# Altium PCB SB_Valve_3_v1.1.PcbDoc
Units mm, origin at the board's own origin, x right, y up, seen from the top; angles counter-clockwise.
Board outline 53.4 x 39.3 mm, 2 copper layers (Top Layer, Bottom Layer), stack 1.569 mm thick; 15 components, 16 nets, 58 pads, 7 vias.
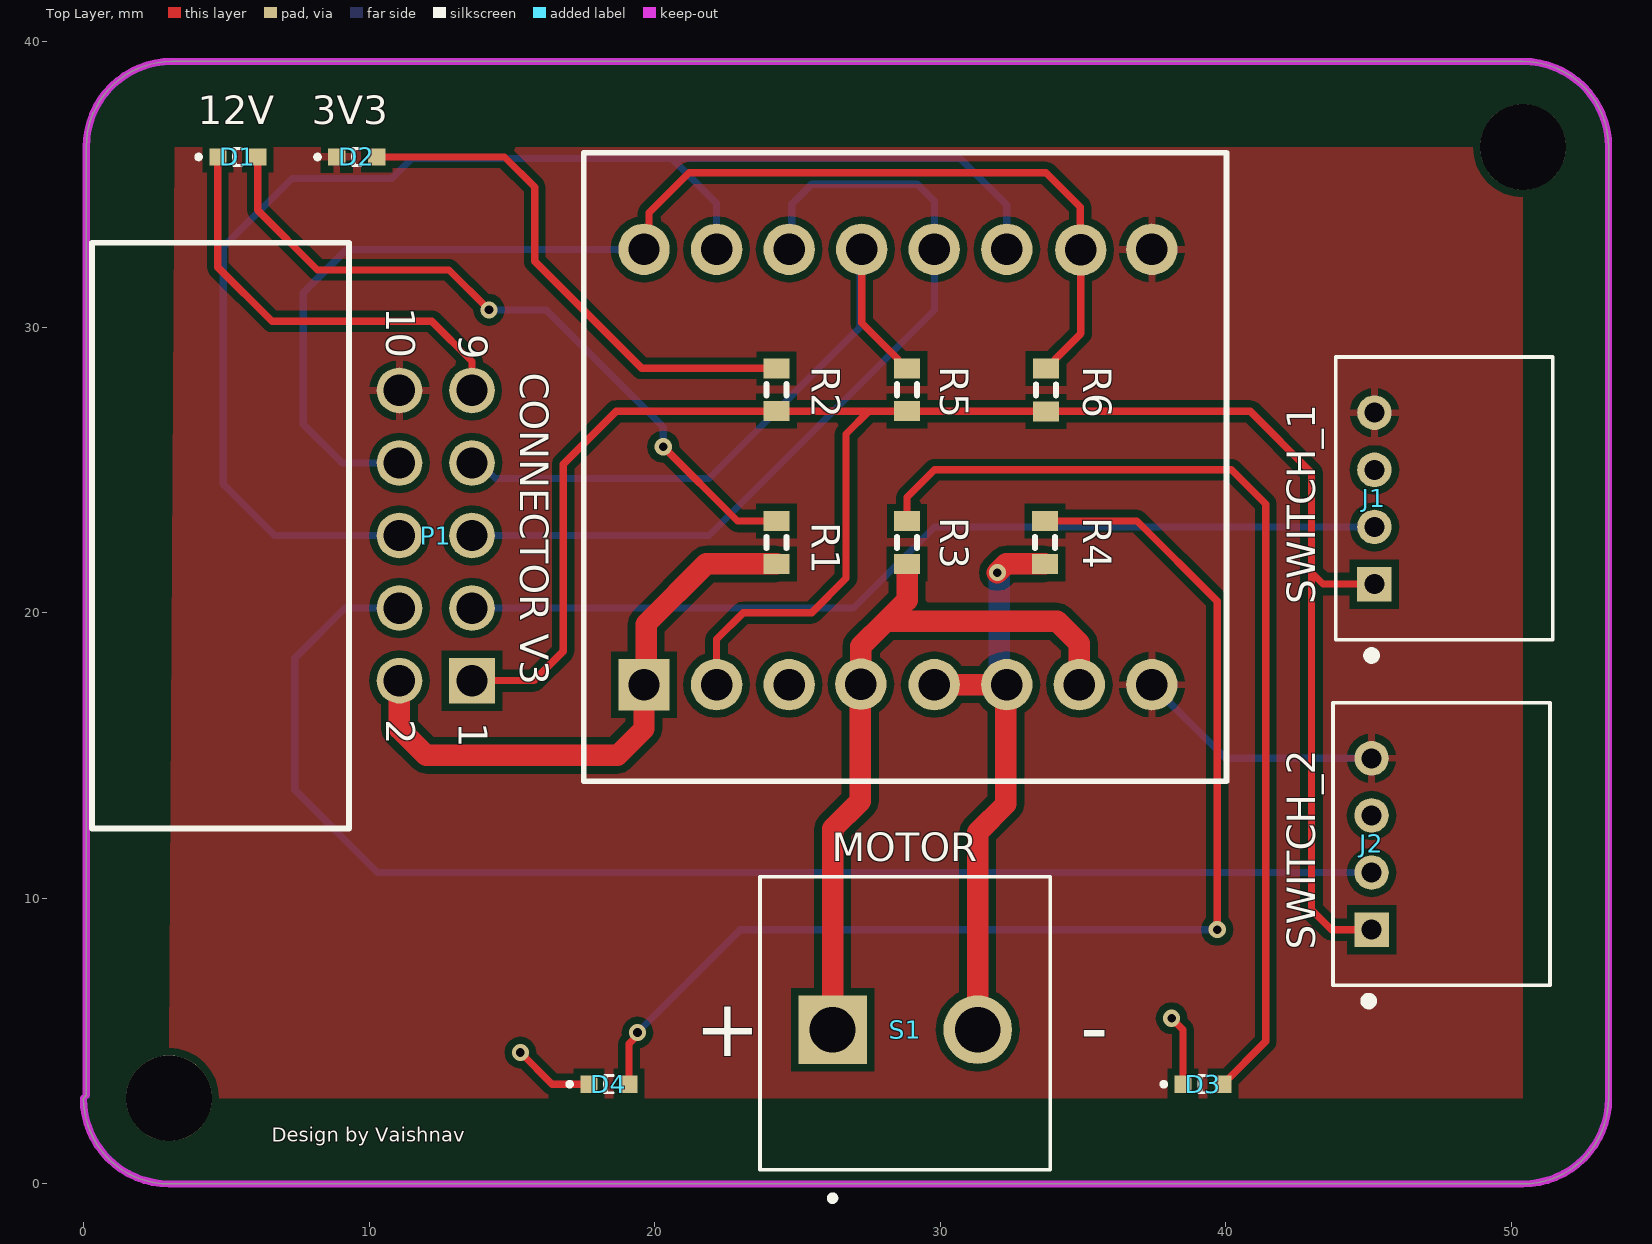
[diagram p0: Top Layer view]
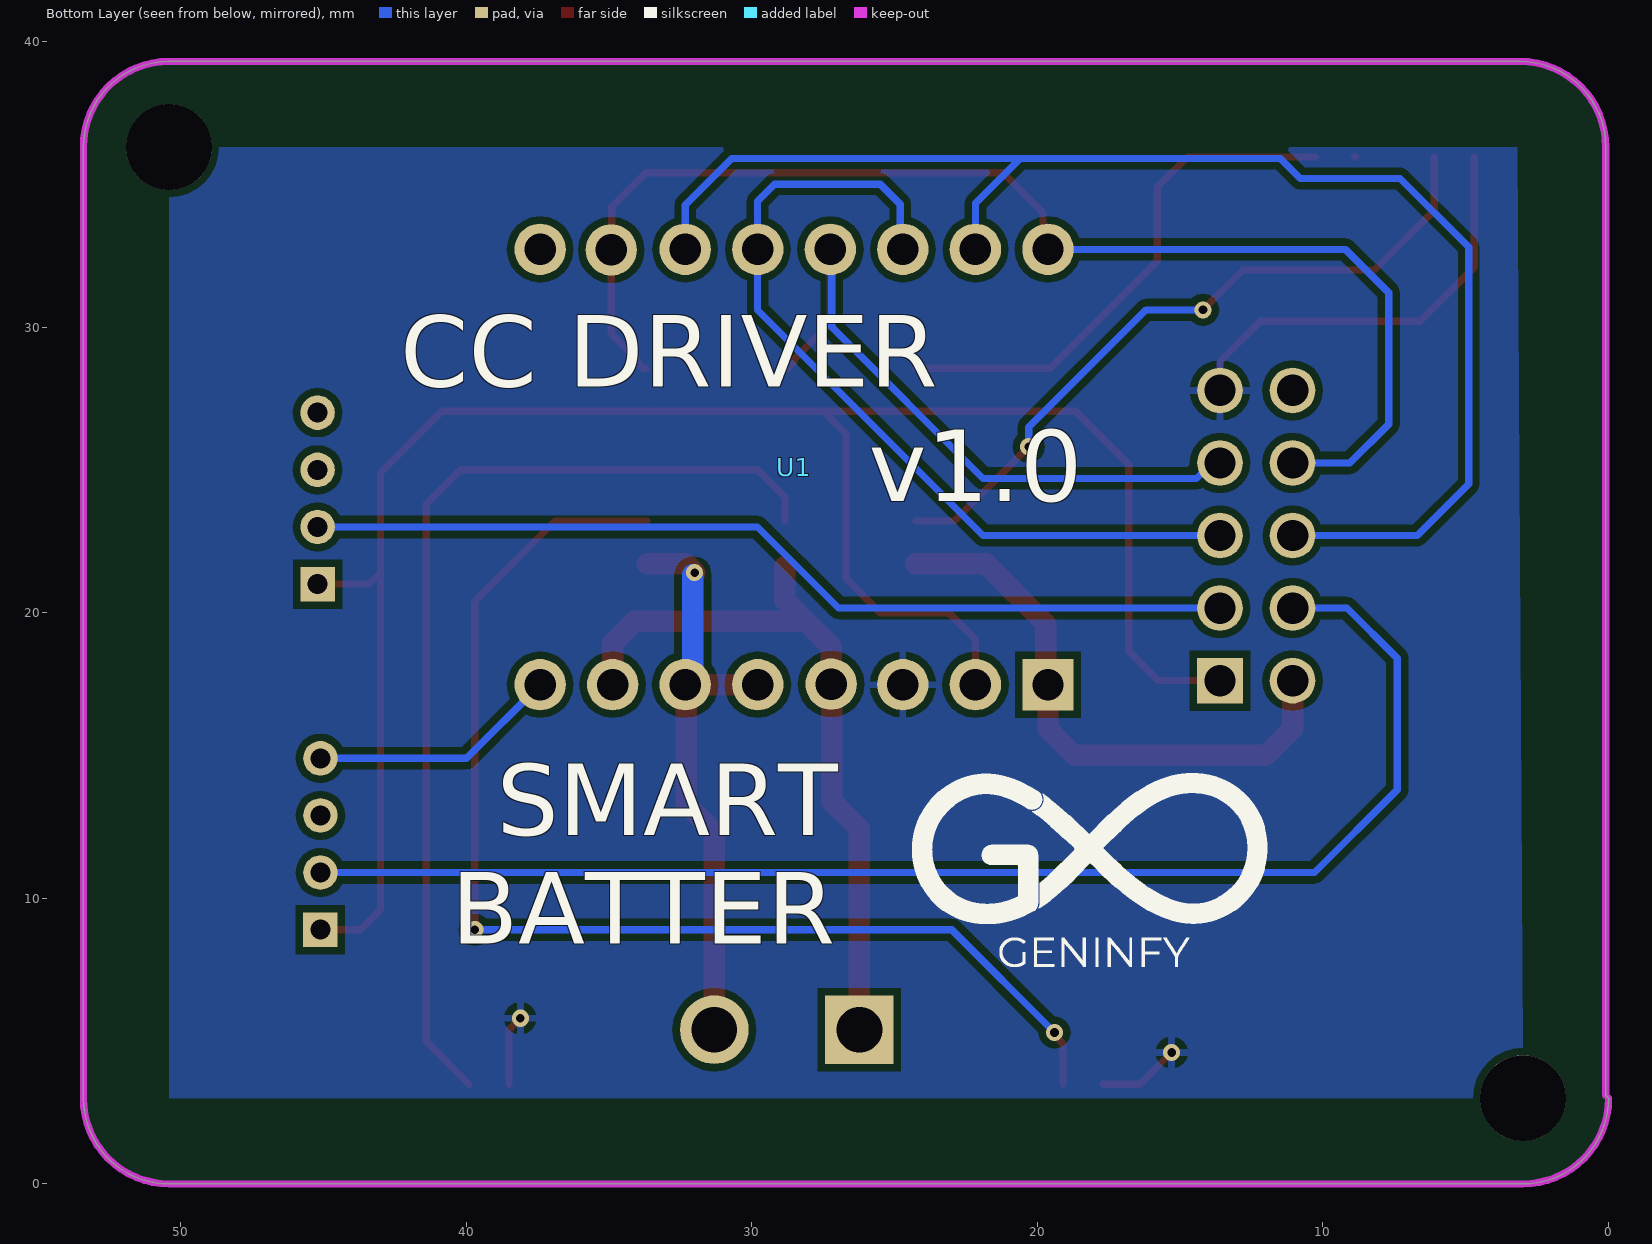
[diagram p1: Bottom Layer view, seen from below]

## Layer stack, top to bottom
Top Solder: solder mask 0.0254, SM-001, Dk 4
Top Layer: signal copper 0.035
Dielectric 1: core 1.4986, Core-043, Dk 4.3
Bottom Layer: signal copper 0.035
Bottom Solder: solder mask 0.0254, SM-001, Dk 4

## Board outline
3,0 cw(c3,3) 0,3 0.1,3.1 0.1,36.3 cw(c3.1,36.3) 3.1,39.3 50.4,39.3 cw(c50.4,36.3) 53.4,36.3 53.4,3 cw(c50.4,3) 50.4,0

## Design rules (kind name [scope] priority, off if disabled: settings)
Clearance [All] p1: gap=0.254 ignorepadtopadclearanceinfootprint=FALSE except(0: Arc-Hole Track-Hole SMDPad-Hole THPad-Hole Via-Hole Fill-Hole Poly-Hole Region-Hole Text-Hole)
HoleSize [All] p1: absolutevalues=TRUE maxlimit=4 minlimit=0.025 maxpercent=80.000 minpercent=20.000
PolygonConnect [All] p1: connectstyle=Relief reliefconductorwidth=0.254 reliefentries=4 polygonreliefangle="90 Angle" airgapwidth=0.254
RoutingVias [All] p1: holewidth=0.711 width=1.27 viastyle="Through Hole" minholewidth=0.711 minwidth=1.27 maxholewidth=0.711 maxwidth=1.27
SolderMaskExpansion [All] p1: expansion=0.102 istentingtop=FALSE
Width [All] p1: maxlimit=1 minlimit=0.254 preferedwidth=0.254
29 further rules are at their usual default settings.

## Components (designator, comment, footprint, x,y, rotation, side; value= is the part's Value field where it differs from the comment)
D1 "Red, 2V" WL-SMSW_0603_Rectangular 5.407,36.164 r0 top
D2 "Red, 2V" WL-SMSW_0603_Rectangular 9.571,36.164 r0 top
D3 "Red, 2V" WL-SMSW_0603_Rectangular 39.2,3.7 r0 top
D4 "Red, 2V" WL-SMSW_0603_Rectangular 18.4,3.7 r0 top
J1 "S4B-PH-K-S(LF)(SN)" JST_S4B-PH-K-S(LF)(SN) 45.2,24 r90 top
J2 "S4B-PH-K-S(LF)(SN)" JST_S4B-PH-K-S(LF)(SN) 45.1,11.9 r90 top
P1 "61201021721" 61201021721 4.8,22.7 r270 top
R1 "R4" J1-0603 24.266,22.458 r90 top value=10K
R2 "R3" J1-0603 24.266,27.804 r90 top value=10K
R3 "R5" J1-0603 28.838,22.458 r90 top value=10K
R4 "R6" J1-0603 33.664,22.458 r90 top value=10K
R5 "R2" J1-0603 28.838,27.804 r270 top value=10K
R6 "R1" J1-0603 33.7,27.8 r270 top value=10K
S1 "TB007-508-02BE" CUI_TB007-508-02BE 26.229,5.4 r0 top
U1 "Female Headers" TB6612FNG 28.519,25.098 r90 bottom

## Footprints (in the part's own frame and the unit in brackets; to place one, negate y for a bottom-side part, rotate by r counter-clockwise, add the part's x,y. Pads: shape width x height; smd on the part's side, far side on the other; paste and mask are expansions set on the pad)
61201021721 [mm] "10 pins, right angled, gold plating"
  rect 1.6x1.6 hole 1.1: 1(5.08,8.805)
  round 1.6 hole 1.1: 2(5.08,6.265) 3(2.54,8.805) 4(2.54,6.265) 5(0,8.805) 6(0,6.265) 7(-2.54,8.805) 8(-2.54,6.265) 9(-5.08,8.805) 10(-5.08,6.265)
  silkscreen extent -10.26,-4.5 10.26,4.5, body extent -10.18,-4.42 10.18,9.13, height 9.23
CUI_TB007-508-02BE [mm]
  rect 2.4x2.4 hole 1.6: 1(0,0)
  round 2.4 hole 1.6: 2(5.08,0)
  silkscreen extent -2.54,-6 7.62,5.35
J1-0603 [mm] "Chip Resistor, Body 1.6x0.8mm, IPC High Density"
  rect 0.7x0.9 smd: 1(-0.75,0) 2(0.75,0)
  silkscreen extent -0.2,-0.35 0.2,0.35, body extent -0.85,-0.48 0.85,0.48, height 0.9
JST_S4B-PH-K-S(LF)(SN) [mm]
  rect 1.208x1.208 hole 0.7: 1(-3,0)
  round 1.208 hole 0.7: 2(-1,0) 3(1,0) 4(3,0)
  silkscreen extent -5.64,-6.25 4.95,1.35
TB6612FNG [mm]
  rect 1.8x1.8 hole 1.1: 1(-7.62,-8.89)
  round 1.8 hole 1.1: 2(-7.62,-6.35) 3(-7.62,-3.81) 4(-7.6,-1.3) 5(-7.62,1.27) 6(-7.62,3.81) 7(-7.62,6.35) 8(-7.62,8.89) 9(7.62,8.89) 10(7.6,6.4) 11(7.62,3.81) 12(7.62,1.27) 13(7.62,-1.27) 14(7.62,-3.81) 15(7.62,-6.35) 16(7.62,-8.89)
  body extent -10.35,-10.29 10.55,10.69, height 13.55
WL-SMSW_0603_Rectangular [mm] "SMT Mono-color Side view Waterclear, body 1.6x0.98mm"
  rect 0.6x0.6 smd: 1(-0.7,-0.21) 2(0.7,-0.21)
  silkscreen extent -1.45,-0.51 0.15,0.09, body extent -0.8,-0.5 0.8,0.48, height 0.8

## Part data
D1 D2 D3 D4: library part 155060RS75300, "WL-SMSW SMT Mono-color Side View Waterclear, size 0603, Red, 2V, 140deg", Emitting Color=Red, Forward Voltage typ.=2V, Manufacturer="Wurth Elektronik", Operating Temperature="-40 to +85degC", Chip Technology=AlInGaP, ComponentLink1Description=Manufacturer, ComponentLink1URL=http://www.we-online.de, ComponentLink2Description=Datasheet, ComponentLink2URL=https://www.we-online.com/catalog/datasheet/155060RS75300.pdf, Dominant Wavelength typ.=625nm, Luminous Intensity typ.=150mcd, Manufacturer Part Number=155060RS75300, Mounting Technology=SMT, Packaging="Tape and Reel", Peak Wavelength typ.=630nm, Published Date="October 2020", Size=0603, Viewing Angle=140deg
J1 J2: "Connector Header Through Hole, Right Angle 4 position 0.079 _2.00mm_", Package=None, Availability=Unavailable, MF="JST Sales", MP=S4B-PH-K-S_LF__SN_, Price=None, SnapEDA_Link=https://www.snapeda.com/parts/S4B-PH-K-S%28LF%29%28SN%29/JST%20Sales%20America%20Inc./view-part/591324/?ref=snap
P1: library part CMP-1502-00021-1, "Male Box Header WR-BHD, THT, Angled, pitch 2.54 mm, 10 pins", Contact Resistance=20mOhm, Manufacturer="Wurth Elektronik", Operating Temperature=-40to125degC, Withstanding Voltage=500VAC, Working Voltage=250VAC, Datasheet URL=https://katalog.we-online.de/em/datasheet/6120xx21721.pdf, Gender=Male, Manufacturer URL=http://www.we-online.de, Mounting Technology=THT, Orientation=Angled, Package Reference=61201021721, Packaging=Tray, Part Number=61201021721, Pin Number=10, Pitch=2.54mm, Published Date=August2018, Publisher=WurthElektronik
R1 R2 R3 R4 R5 R6: library part Res3, "Resistor", LatestRevisionDate=29-May-2009, LatestRevisionNote="IPC-7351 Footprint Added.", PackageDescription="Chip Resistor", PackageReference=J1-0603, Published=8-Jun-2000, Publisher="Altium Limited"
S1: "2~24 Poles, Screw Type, Horizontal, 5.08 Pitch, 24~12 _AWG_, Terminal Block Connector", Package=None, Availability=Unavailable, MF="CUI Devices", MP=TB007-508-02BE, Price=None, SnapEDA_Link=https://www.snapeda.com/parts/TB007-508-02BE/CUI%20Devices/view-part/3591212/?ref=snap
U1: library part "TB6612FNG Female", "Motor Driver"

## Free pads (board coordinates)
  round 3 hole 3 unplated: ""(3,3) ""(50.4,36.3)

## Via types
v1: diameter 0.6, hole 0.3, Top Layer to Bottom Layer, tented both sides, 7 vias

## Nets (pads, with @x,y where several pads share a name; then routed paths per layer and width w, separated by ;. In a path a pad name is that pad's centre, name@x,y a point inside that pad or via, vN(x,y) a via of type N, cw(c..) or ccw(c..) an arc to the next point about the centre after c; other vN are vias at no path point)
+3V3: J1.1 J2.1 P1.1 R2.1 R5.2 R6.2 U1.2 | length 71.1
  Top Layer w0.254: P1.1 15.771,17.62 16.8,18.649 16.8,25.2 18.654,27.054 R2.1 27.5,27.054 ; U1.2 22.169,19.069 23.1,20 25.5,20 26.7,21.2 26.7,26.254 27.5,27.054 ; R6.2@33.537,27.054 R5.2 27.5,27.054 ; R6.2 40.85,27.05 43,24.9 43,21.4 ; J2.1 43.7,8.9 43,9.6 43,21.4 ; J1.1 43.4,21 43,21.4
+12V: P1.2 R1.1 U1.1 | length 20.2
  Top Layer w0.254: U1.1 U1.1@19.7,17.549
  Top Layer w0.75: P1.2 11.065,15.935 12,15 18.7,15 19.629,15.929 U1.1 ; U1.1@19.7,17.549 19.7,19.6 21.808,21.708 R1.1
GND: D2.1 J1.4 J2.4 P1.10 U1.8 U1.9 | length 9
  Top Layer w0.254: D2.1 D2.1@8.9,35.982
  Bottom Layer w0.254: U1.8 39.987,14.9 J2.4
  Bottom Layer w0.5: U1.9@37.29,32.837 U1.9
Input_1: P1.5 U1.12 U1.14 | length 30.4
  Bottom Layer w0.254: P1.5 21.9,22.7 29.795,30.595 29.795,32.712 U1.12 29.8,32.729 29.8,34.4 29.2,35 25.5,35 24.799,34.299 24.799,32.808 U1.14
Input_2: P1.6 U1.11 U1.15 | length 50
  Bottom Layer w0.254: P1.6 6.7,22.7 4.9,24.5 4.9,32.8 7.3,35.2 10.8,35.2 11.5,35.9 20.6,35.9 ; U1.15 22.169,34.331 20.6,35.9 ; U1.11 32.329,34.271 30.7,35.9 20.6,35.9
NetD1_2: D1.2 R1.2 | length 24.9
  Top Layer w0.254: D1.2 6.107,34.093 8.2,32 12.8,32 v1(14.2,30.6) ; v1(20.3,25.808) 22.9,23.208 R1.2
  Bottom Layer w0.254: v1(14.2,30.6) 16.2,30.6 20.3,26.5 v1(20.3,25.808)
NetD2_2: D2.2 R2.2 | length 18.6
  Top Layer w0.254: D2.2 14.746,35.954 15.8,34.9 15.8,32.3 19.546,28.554 R2.2
NetD3_2: D3.2 R3.2 | length 35.2
  Top Layer w0.254: R3.2 28.838,24.038 29.8,25 40.2,25 41.4,23.8 41.4,4.99 D3.2
NetD4_2: D4.2 R4.2 | length 42.4
  Top Layer w0.254: D4.2 19.1,4.906 19.4,5.206 v1(19.4,5.3) ; R4.2 36.892,23.208 39.7,20.4 v1(39.7,8.9)
  Bottom Layer w0.254: v1(19.4,5.3) 23,8.9 v1(39.7,8.9)
Output_1: R3.1 S1.1 U1.4 U1.7 | length 25.8
  Top Layer w0.254: U1.4@27.2,17.479 U1.4
  Top Layer w0.75: S1.1 26.229,12.429 27.2,13.4 U1.4@27.2,17.479 ; U1.4 27.219,18.819 28.1,19.7 ; R3.1@28.838,21.6 28.838,20.438 28.1,19.7 ; U1.7 34.869,18.931 34.1,19.7 28.1,19.7
Output_2: R4.1 S1.2 U1.5 U1.6 | length 23.5
  Top Layer w0.254: U1.5@29.9,17.367 U1.5 U1.6 U1.6@32.3,17.449
  Top Layer w0.75: U1.5@29.9,17.478 U1.6 ; S1.2 31.309,12.309 32.3,13.3 U1.6@32.3,17.449 ; v1(32,21.4) 32.308,21.708 R4.1
  Bottom Layer w0.254: v1(32,21.4) v1@32.066,21.334 ; U1.6@32.066,17.741 U1.6
  Bottom Layer w0.75: U1.6@32.066,17.741 v1@32.066,21.334
PGND: D1.1 D3.1 D4.1 P1.9 U1.3 | length 20.5
  Top Layer w0.254: D1.1 4.707,32.093 6.6,30.2 12.2,30.2 13.605,28.795 P1.9 ; v1(15.3,4.6) 16.41,3.49 D4.1 ; v1(38.1,5.8) 38.5,5.4 D3.1
PWM: P1.8 R6.1 U1.10 U1.16 | length 44.8
  Top Layer w0.254: U1.16 19.799,32.888 19.799,33.999 21.2,35.4 33.7,35.4 34.9,34.2 34.9,32.717 U1.10 34.919,29.769 34.023,28.873 34.023,28.773 33.8,28.55 R6.1
  Bottom Layer w0.254: P1.8 9.06,25.24 7.7,26.6 7.7,31.2 9.218,32.718 U1.16
Signal_1: J1.2 P1.3 | length 32.8
  Bottom Layer w0.254: P1.3 26.96,20.16 29.8,23 J1.2
Signal_2: J2.2 P1.4 | length 47.9
  Bottom Layer w0.254: P1.4 9.16,20.16 7.4,18.4 7.4,13.8 10.3,10.9 J2.2
STBY: P1.7 R5.1 U1.13 | length 23.6
  Top Layer w0.254: U1.13 27.249,30.143 28.515,28.877 28.515,28.777 28.738,28.554 R5.1
  Bottom Layer w0.254: P1.7 13.887,25.24 14.427,24.7 21.9,24.7 27.2,30 27.2,32.669 U1.13
pads on no net: J1.3 J2.3

## Polygon pours and split planes (outlines as drawn)
PGND on Bottom Layer "PGND_L02_P001" (solid, pour order 1): 3.1,36.3 3.2,36.3 3,3 50.4,3 50.4,36.3
GND on Top Layer "GND_L01_P000" (solid, pour order 0): 3.1,36.3 3.2,36.3 3,3 50.4,3 50.4,36.3

## Keep-outs
Keep-Out Layer:
  lines w0.254: 0,3 ccw(c3,3) 3,0 50.4,0 ccw(c50.4,3) 53.4,3 53.4,36.3 ccw(c50.4,36.3) 50.4,39.3 3.1,39.3 ccw(c3.1,36.3) 0.1,36.3 0.1,3.1

## Silkscreen, mask and mechanical layers (free items; w line width, h text height)
Top Overlay:
  text "12V" at 4,37.1 h1
  text "3V3" at 8,37.1 h1
  text "CONNECTOR V3" at 15.3,28.4 h1 r270
  text "SWITCH_1" at 43.133,20.3 h1 r90
  text "MOTOR" at 26.2,11.3 h1
  text "SWITCH_2" at 43.133,8.2 h1 r90
  text "-" at 34.9,4.5 h2
  text "+" at 21.4,4.467 h2
  text "Design by Vaishnav" at 6.6,1.467 h0.5
Bottom Overlay:
  drawing of 9 lines, arcs and shapes, not listed
  text "CC DRIVER" at 42.3,27.9 h2.5
  text "v1.0" at 25.9,23.9 h2.5
  text "SMART" at 38.927,12.202 h2.5
  text "BATTER" at 40.527,8.402 h2.5
Mechanical 13:
  circle w0.254: c50.371,36.274 r1.656
  circle w0.254: c3,3 r1.656

## Text inside footprints (layer, text, board x,y; h text height)
P1: Top Overlay "9" at 13.14,29.74 h1.02 r270; Top Overlay "10" at 10.6,30.7 h1.02 r270; Top Overlay "2" at 10.6,16.26 h1.02 r270; Top Overlay "1" at 13.14,16.16 h1.02 r270